# EAGLE board BME280_Daughter_1_1 (EAGLE 8.3.2)
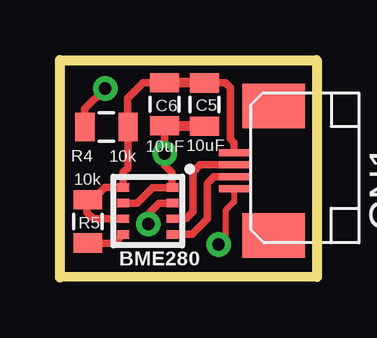
[diagram p0: board, top side]
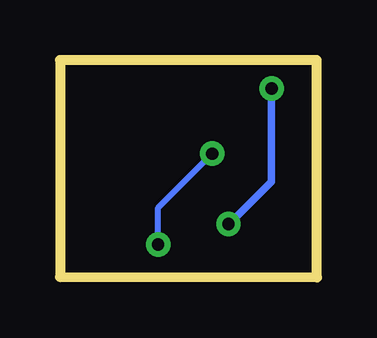
[diagram p1: board, bottom side, seen from below]

Size 10.72 x 9.07 mm. Coordinates in mm from the lower left corner, seen from the top.
Outline: 0,0 0.01,9.07 10.71,9.07 10.72,0.02 0.02,0.04
Copper layers (1*16): Top 0.035mm / dielectric 1.5mm / Bottom 0.035mm
Design rules "SparkFun": minimum track width 8mil, minimum drill 20mil, track to track 8mil, track to pad 8mil, pad to pad 8mil, via to via 8mil, smd to smd 8mil, copper to edge 8mil, drill to drill 8mil, minimum pad ring 12mil, minimum via ring 10mil, stop-mask expansion 4mil, vias tented up to drill 20mil, thermal gap 10mil

## Footprints (pad centres in the part's own frame; a part is rotated, then mirrored left to right if it is on the bottom)
0805 = smd 0.8 x 1.2: 1 -0.9,0; 2 0.9,0
FPC_0.5MM-4 = smd 0.3 x 1.25: 1 -0.75,-0.45; 2 -0.25,-0.45; 3 0.25,-0.45; 4 0.75,-0.45 | smd 1.85 x 2.6: MT -2.7,-2.1; MT2 2.7,-2.1
BME280_LGA = smd 0.5 x 0.35: P$1 1.025,0.975; P$2 1.025,0.325; P$3 1.025,-0.325; P$4 1.025,-0.975; P$5 -1.025,-0.975; P$6 -1.025,-0.325; P$7 -1.025,0.325; P$8 -1.025,0.975

## Placement (x,y rotation side)
C5  10uF  [0805]  6.04,7.21 270 top
C6  10uF  [0805]  4.37,7.23 270 top
CN1  1X4FPC0.5  [FPC_0.5MM-4]  6.82,4.45 90 top
FRAME1  FRAME-LETTER  [CREATIVE_COMMONS]  13.95,-12.09 0 top  (outside the outline)
R4  10k  [0805]  1.94,6.27 0 top
R5  10k  [0805]  1.17,2.34 90 top
U3  BME280  [BME280_LGA]  3.67,2.78 0 top

## Library data of the parts
C5 C6 = SparkFun-Capacitors
CN1 = adafruit
FRAME1 = SparkFun-Aesthetics
R4 R5 = SparkFun-Passives
U3 = BME280ComponentLibrary; PROD_ID: IC-13090

## Nets
GND: C5.2 C6.2 CN1.1 U3.P$1 U3.P$7
N$5: R4.1 U3.P$2
N$17: R5.1 U3.P$5
SCL: CN1.2 U3.P$4
SDA: CN1.3 U3.P$3
VIN: C5.1 C6.1 CN1.4 R4.2 R5.2 U3.P$6 U3.P$8

## Tracks (layer width: path | path; a pad name or v marks a point on that pad's centre or on a via)
GND  (via drill 0.51 pad 1.02)
  Top 0.254: CN1.1 7.27,3.16 6.91,2.8 6.91,1.67 v6.62,1.38
  Top 0.305: C6.2 v4.37,5.17 4.37,4.68 4.67,4.38 4.67,3.77 U3.P$1 3.87,3.75 3.23,3.1 U3.P$7
  Top 0.406: C5.2 4.38,6.32 C6.2
  Bottom 0.254: v6.62,1.38 6.62,2.92 v4.37,5.17
N$5  (via drill 0.51 pad 1.02)
  Top 0.305: R4.1 1.04,7.03 v1.89,7.88 | v3.69,2.24 3.69,2.66 4.13,3.1 U3.P$2
  Bottom 0.305: v1.89,7.88 1.89,4 3.69,2.2 v3.69,2.24
N$17
  Top 0.305: R5.1 2.28,1.44 U3.P$5
SCL
  Top 0.305: CN1.2 6.42,4.2 6.15,3.93 6.15,2.45 5.51,1.81 U3.P$4
SDA
  Top 0.305: CN1.3 5.85,4.7 5.55,4.4 5.55,2.74 5.28,2.47 4.71,2.47 U3.P$3
VIN
  Top 0.305: CN1.4 7.27,5.63 7.12,5.78 7.12,7.91 6.91,8.12 C5.1 | 2.63,3.77 1.88,3.77 1.35,3.25 R5.2 1.14,3.22 1.14,2.71 1.4,2.45 1.5,2.45 1.5,2.46 U3.P$6 | 2.63,3.77 U3.P$8 | C6.1 3.48,8.13 2.82,7.47 2.82,6.29 R4.2 2.84,4.59 2.64,4.39 2.64,3.79 2.63,3.77
  Top 0.406: C5.1 4.38,8.11 C6.1